# Altium PCB PCB1.PcbDoc
Units mm, origin at the board's own origin, x right, y up, seen from the top; angles counter-clockwise.
Board outline 80.01 x 75.06 mm, 2 copper layers (Top Layer, Bottom Layer); 8 components, 6 nets, 20 pads, 0 vias.
Unrouted connection lines stored in the file: 4.
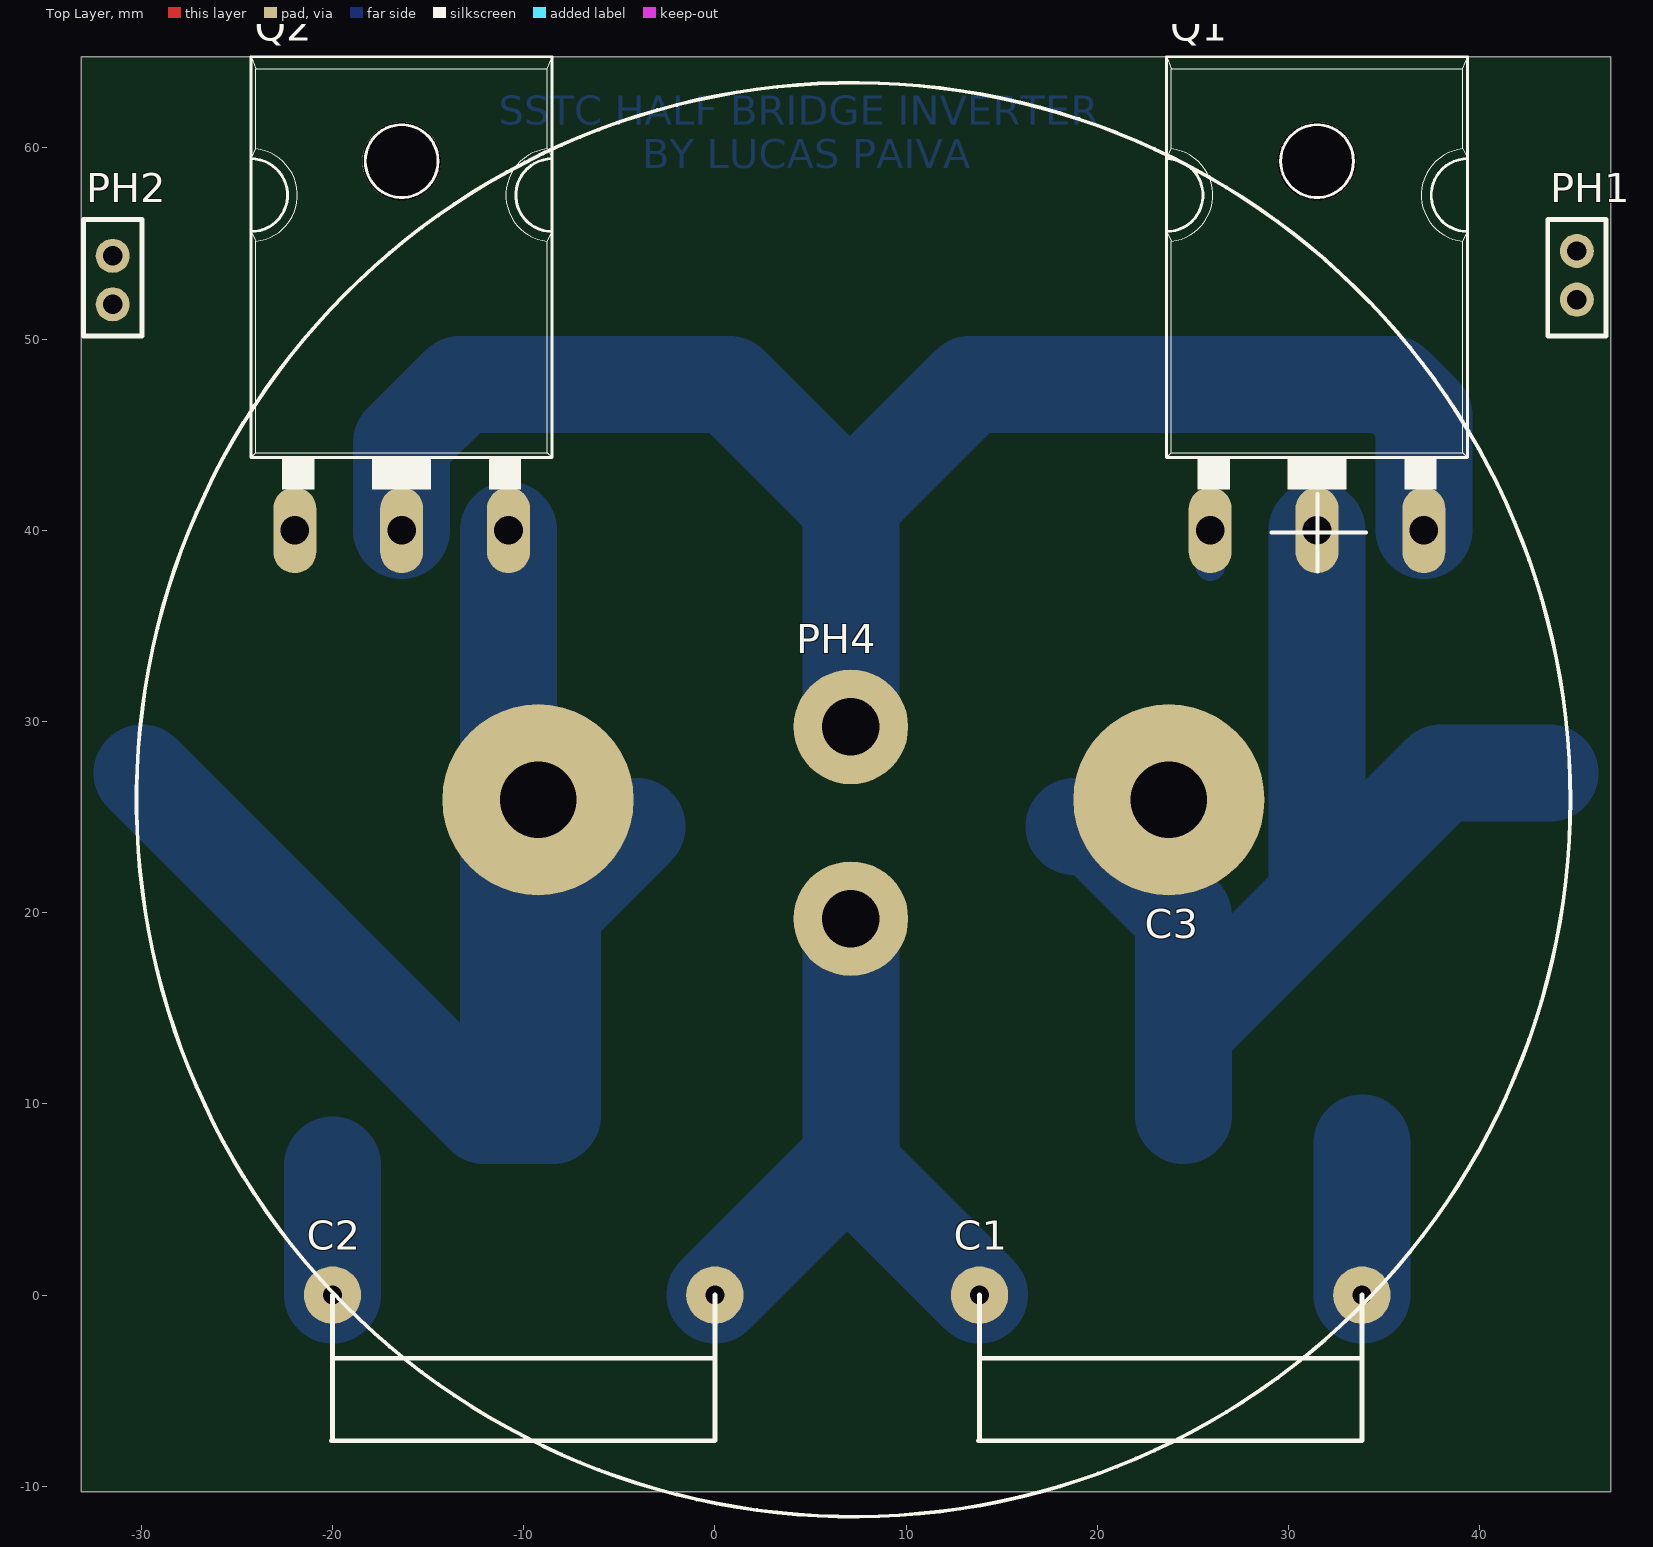
[diagram p0: Top Layer view]
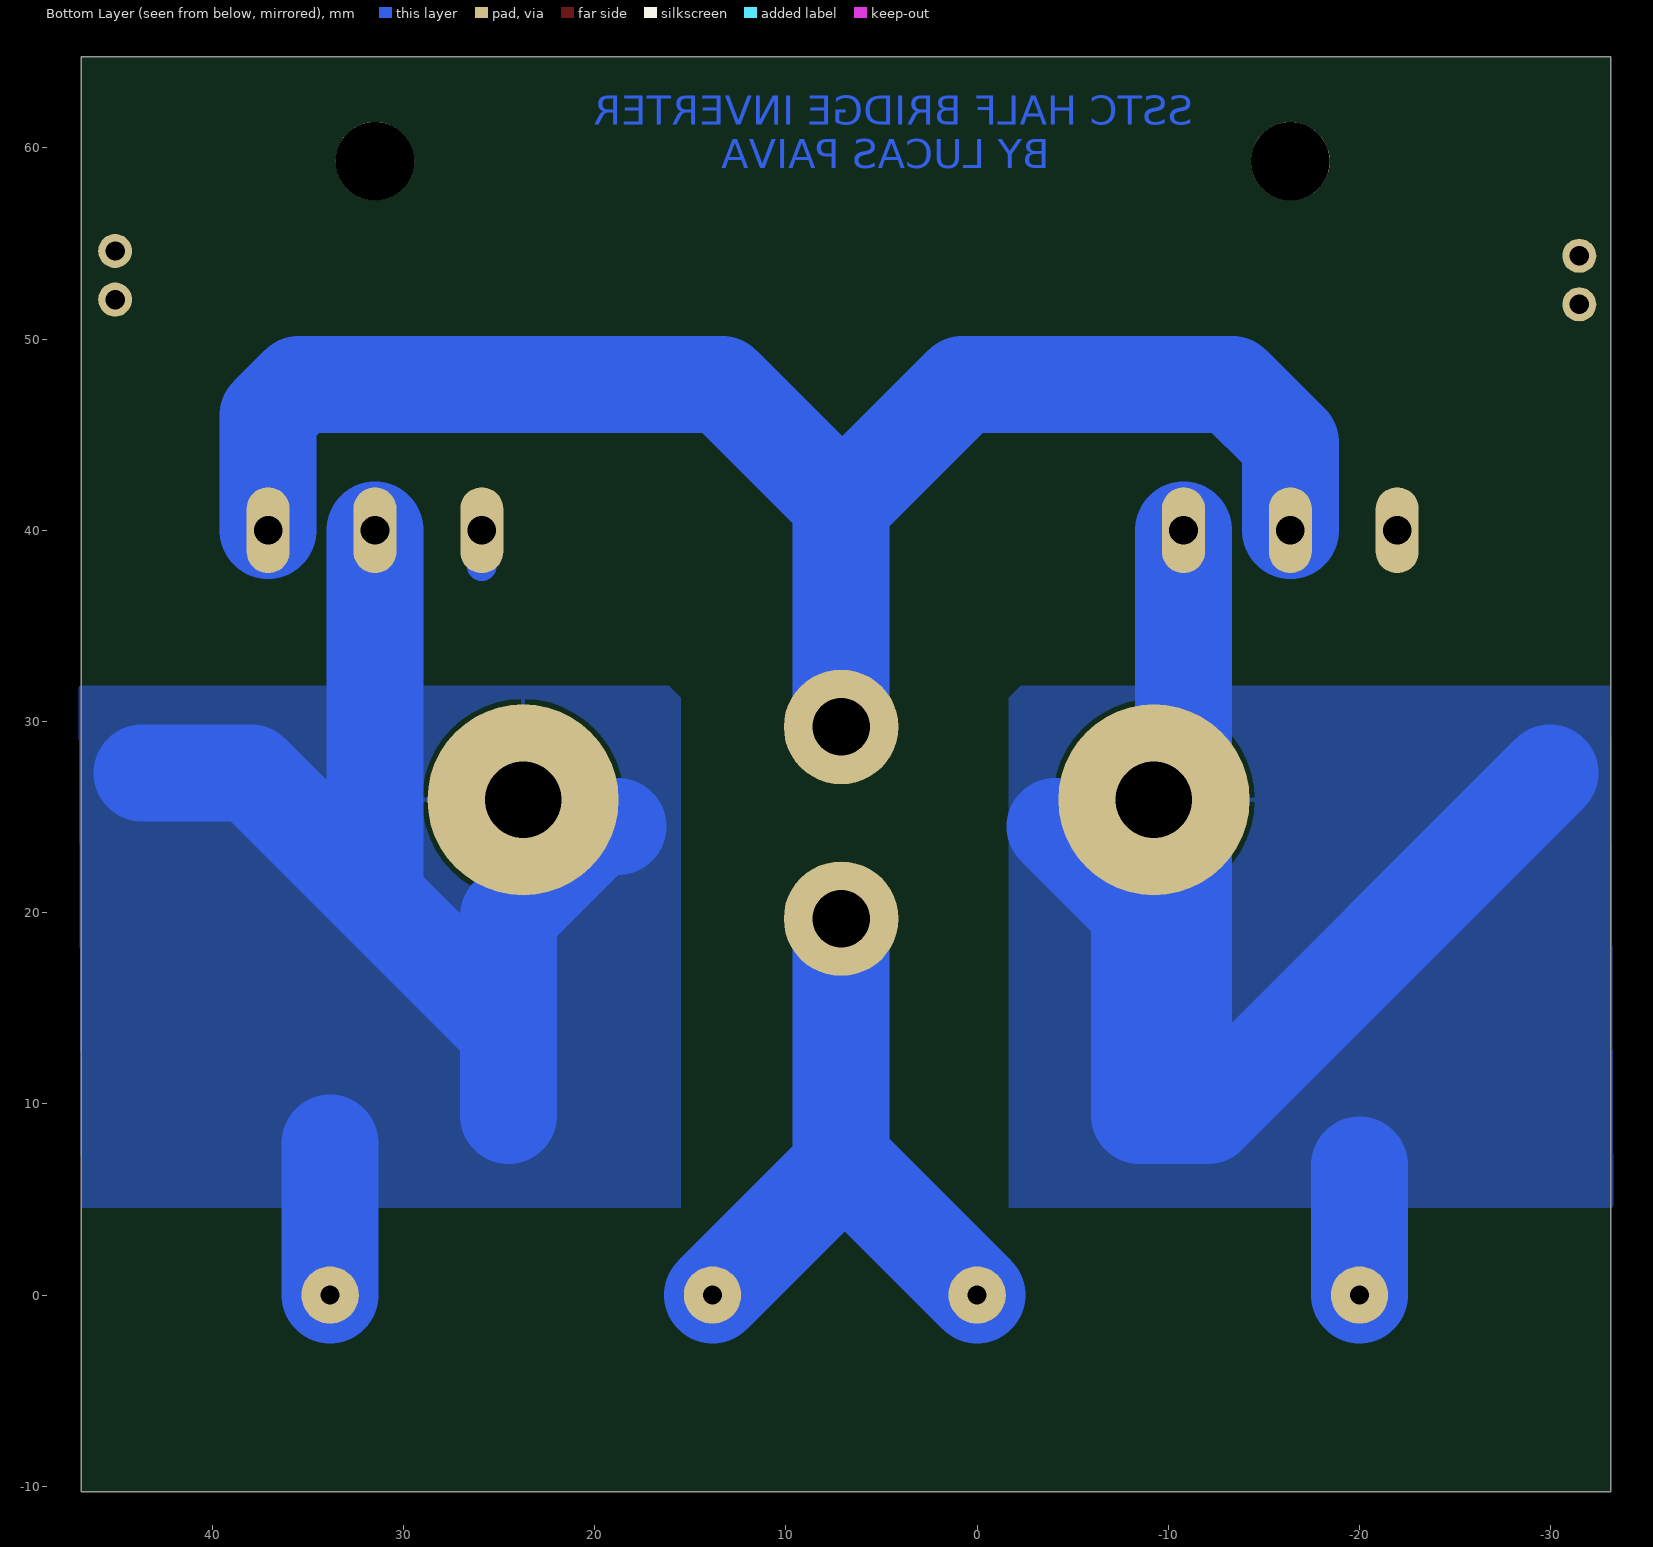
[diagram p1: Bottom Layer view, seen from below]

## Layer stack, top to bottom
Top Solder: solder mask 0.0102, Solder Resist, Dk 3.5
Top Layer: signal copper 0.0356
Dielectric 1: dielectric 0.32, FR-4, Dk 4.8
Bottom Layer: signal copper 0.0356
Bottom Solder: solder mask 0.0102, Solder Resist, Dk 3.5

## Board outline
-33.147,-10.287 46.863,-10.287 46.863,64.77 -33.147,64.77

## Design rules (kind name [scope] priority, off if disabled: settings)
Clearance [All] p1: gap=0.508 ignorepadtopadclearanceinfootprint=FALSE
ComponentClearance [All] p1: gap=0 collisioncheckmode=3 verticalgap=0 showdistances=FALSE
PlaneConnect [All] p1: planeconnectstyle=Direct reliefexpansion=0.508 reliefentries=4 reliefconductorwidth=0.254 reliefairgap=0.254
PolygonConnect [All] p1: connectstyle=Relief reliefconductorwidth=0.254 reliefentries=4 polygonreliefangle="90 Angle" airgapwidth=0.254
RoutingVias [All] p1: holewidth=0.711 width=1.27 viastyle="Through Hole" minholewidth=0.711 minwidth=1.27 maxholewidth=0.711 maxwidth=1.27
SolderMaskExpansion [All] p1: expansion=0.102 istentingtop=FALSE
Width [All] p1: maxlimit=7.62 minlimit=0.254 preferedwidth=0.762
28 further rules are at their usual default settings.

## Classes and differential pairs
component class Sheet1: C1 C2 PH1 PH2 PH4 Q1 Q2

## Components (designator, comment, footprint, x,y, rotation, side; value= is the part's Value field where it differs from the comment)
C1 "Capacitor .68uF" "Capacitor .68uF" 33.843,0 r180 top
C2 "Capacitor .68uF" "Capacitor .68uF" 0,0 r180 top
C3 "Capacitor 4700uF 450V + Power Input" "Capacitor 4700uF 450V RIFA" -9.251,25.908 r0 top
PH1 "PinHead2" PinHead2 45.085,52.07 r90 top
PH2 "PinHead2" PinHead2 -31.496,54.356 r270 top
PH4 "P. OUT FOR PRIMARY" "P. OUT FOR PRIMARY" 7.112,29.718 r270 top
Q1 "IRFP460" IRFP460 25.781,40.132 r0 top
Q2 "IRFP460" IRFP460 -22.098,40.132 r0 top

## Footprints (in the part's own frame and the unit in brackets; to place one, negate y for a bottom-side part, rotate by r counter-clockwise, add the part's x,y. Pads: shape width x height; smd on the part's side, far side on the other; paste and mask are expansions set on the pad)
"Capacitor 4700uF 450V RIFA" [mm]
  round 10 hole 4: 1(0,0) 2(33,0)
  silkscreen extent -21,-37.5 54,37.5
"Capacitor .68uF" [mm]
  round 3 hole 1: 1(0,0) 2(20,0)
  silkscreen extent 0,0 20.07,7.62
IRFP460 [mil]
  oval 88.5x177 hole 59: D(225,-5) G(5,-5) S(445,-5)
  round 162 hole 162 unplated: None(225,755)
  silkscreen extent -85,79 535,970
"P. OUT FOR PRIMARY" [mm]
  round 6 hole 3: 1(0,0) 2(10.033,0)
PinHead2 [mil]
  round 70 hole 40: 1(0,0) 2(100,0)
  silkscreen extent -75,-60 165,60

## Part data
C3: library part "Capacitor 4700uF 450V"

## Nets (pads, with @x,y where several pads share a name; then routed paths per layer and width w, separated by ;. In a path a pad name is that pad's centre, name@x,y a point inside that pad or via, vN(x,y) a via of type N, cw(c..) or ccw(c..) an arc to the next point about the centre after c; other vN are vias at no path point)
GND: C2.2 C3.1 PH2.1 Q2.S | length 84.2
  Bottom Layer w5.08: -29.972,27.305 -12.065,9.398 -8.489,9.398 ; C2.2 -20,6.792 ; Q2.S -10.795,11.704 -8.489,9.398 ; -4.064,24.511 -8.489,20.086 -8.489,9.398
NetC1_2: C1.2 C2.1 PH4.2 | length 32.5
  Bottom Layer w5.08: C2.1 7.112,7.112 ; PH4.2 7.112,7.112 ; C1.2 7.112,6.731 7.112,7.112
NetPH1_1: PH1.1 PH4.1 Q1.S Q2.D | length 84.5
  Bottom Layer w1.524: 7.366,40.005 7.366,41.656
  Bottom Layer w5.08: Q2.D -16.383,44.577 -13.335,47.625 0.762,47.625 7.112,41.275 ; PH4.1 7.112,41.275 ; Q1.S 37.084,46.006 35.465,47.625 13.335,47.625 7.366,41.656 7.112,41.402 7.112,41.275
NetPH1_2: PH1.2 Q1.G | length 1.9
  Bottom Layer w1.524: Q1.G@25.908,38.1 Q1.G
NetPH2_2: PH2.2 Q2.G | length 0.2
  Bottom Layer w1.524: Q2.G Q2.G@-21.844,39.878
VCC: C1.1 C3.2 Q1.D | length 69.9
  Bottom Layer w5.08: 18.796,24.511 19.812,24.511 24.511,19.812 24.511,13.843 ; 24.511,9.398 24.511,13.843 ; Q1.D 31.496,20.828 ; C1.1 33.843,7.94 ; 43.688,27.305 37.973,27.305 31.496,20.828 ; 24.511,13.843 31.496,20.828
pads on no net: Q1.None Q2.None

## Polygon pours and split planes (outlines as drawn)
VCC on Bottom Layer "Bottom Layer-No Net" (solid, pour order 12): 46.99,31.877 16.129,31.877 15.494,31.242 15.494,4.572 46.863,4.572
GND on Bottom Layer "Bottom Layer-No Net" (solid, remove dead copper, pour order 8): -33.147,31.877 -2.286,31.877 -1.651,31.242 -1.651,4.572 -33.274,4.572
no net on Bottom Layer "NONET_L02_P017" (solid, pour order 17): -10.795,11.43
no net on Bottom Layer "NONET_L02_P016" (solid, pour order 16): -10.922,9.779
no net on Bottom Layer "NONET_L02_P014" (solid, pour order 14): -8.128,5.588

## Other copper
Bottom Layer:
  text "SSTC HALF BRIDGE INVERTER" at -11.303,61.214 h1.52
  text "BY LUCAS PAIVA" at -3.81,58.928 h1.52